# Allegro board DRAM_BOARD.brd
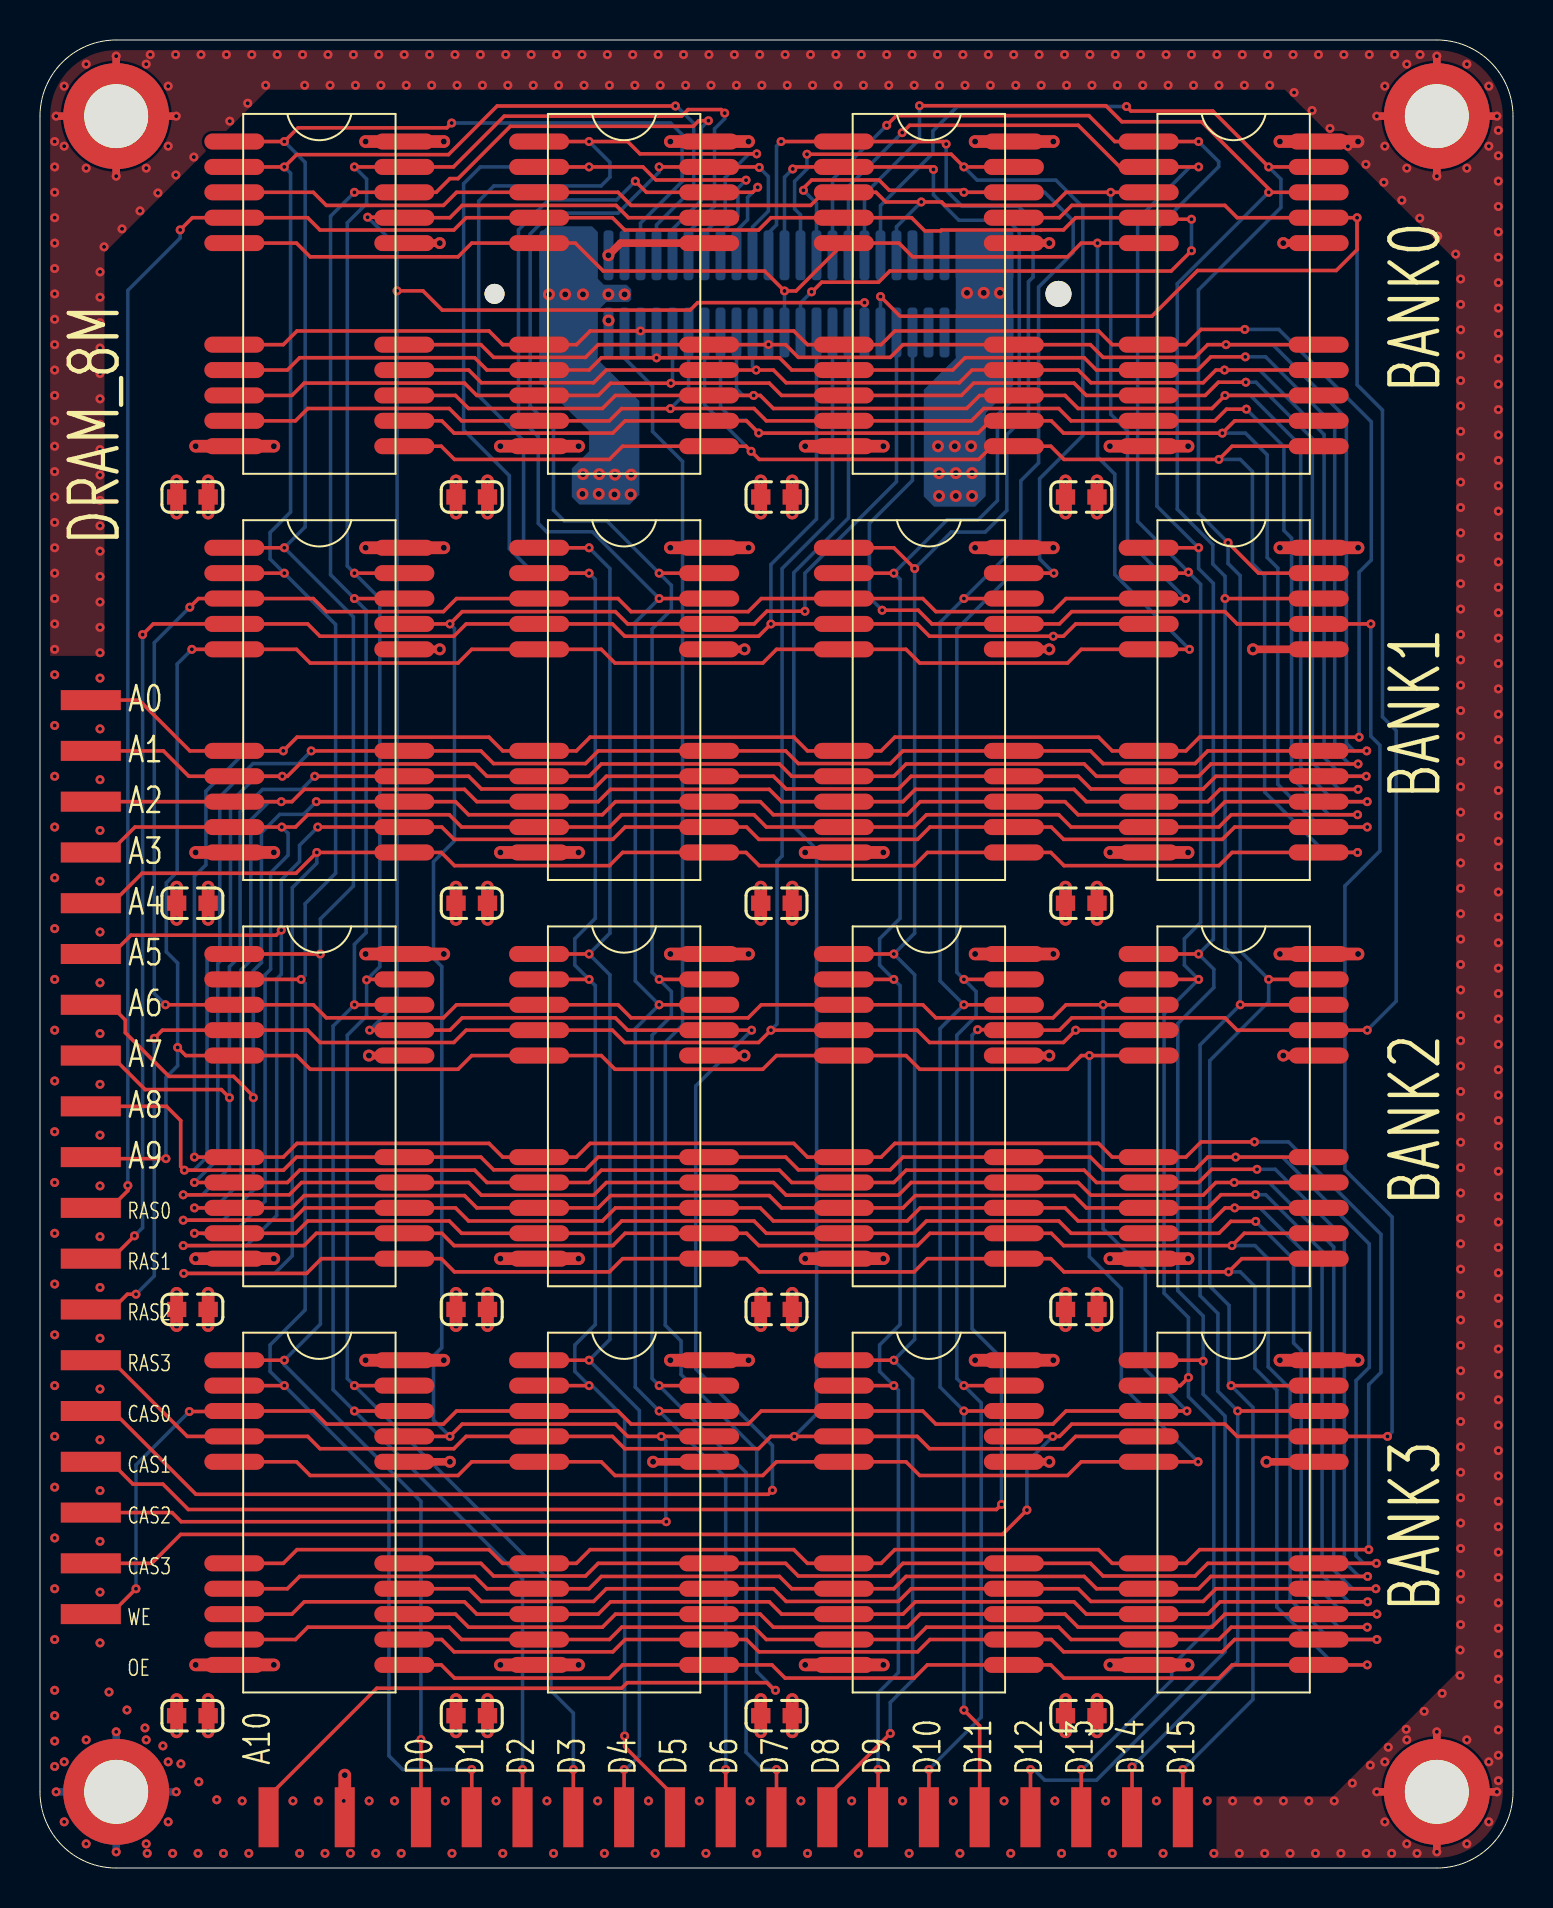
[diagram p0: board, top side]
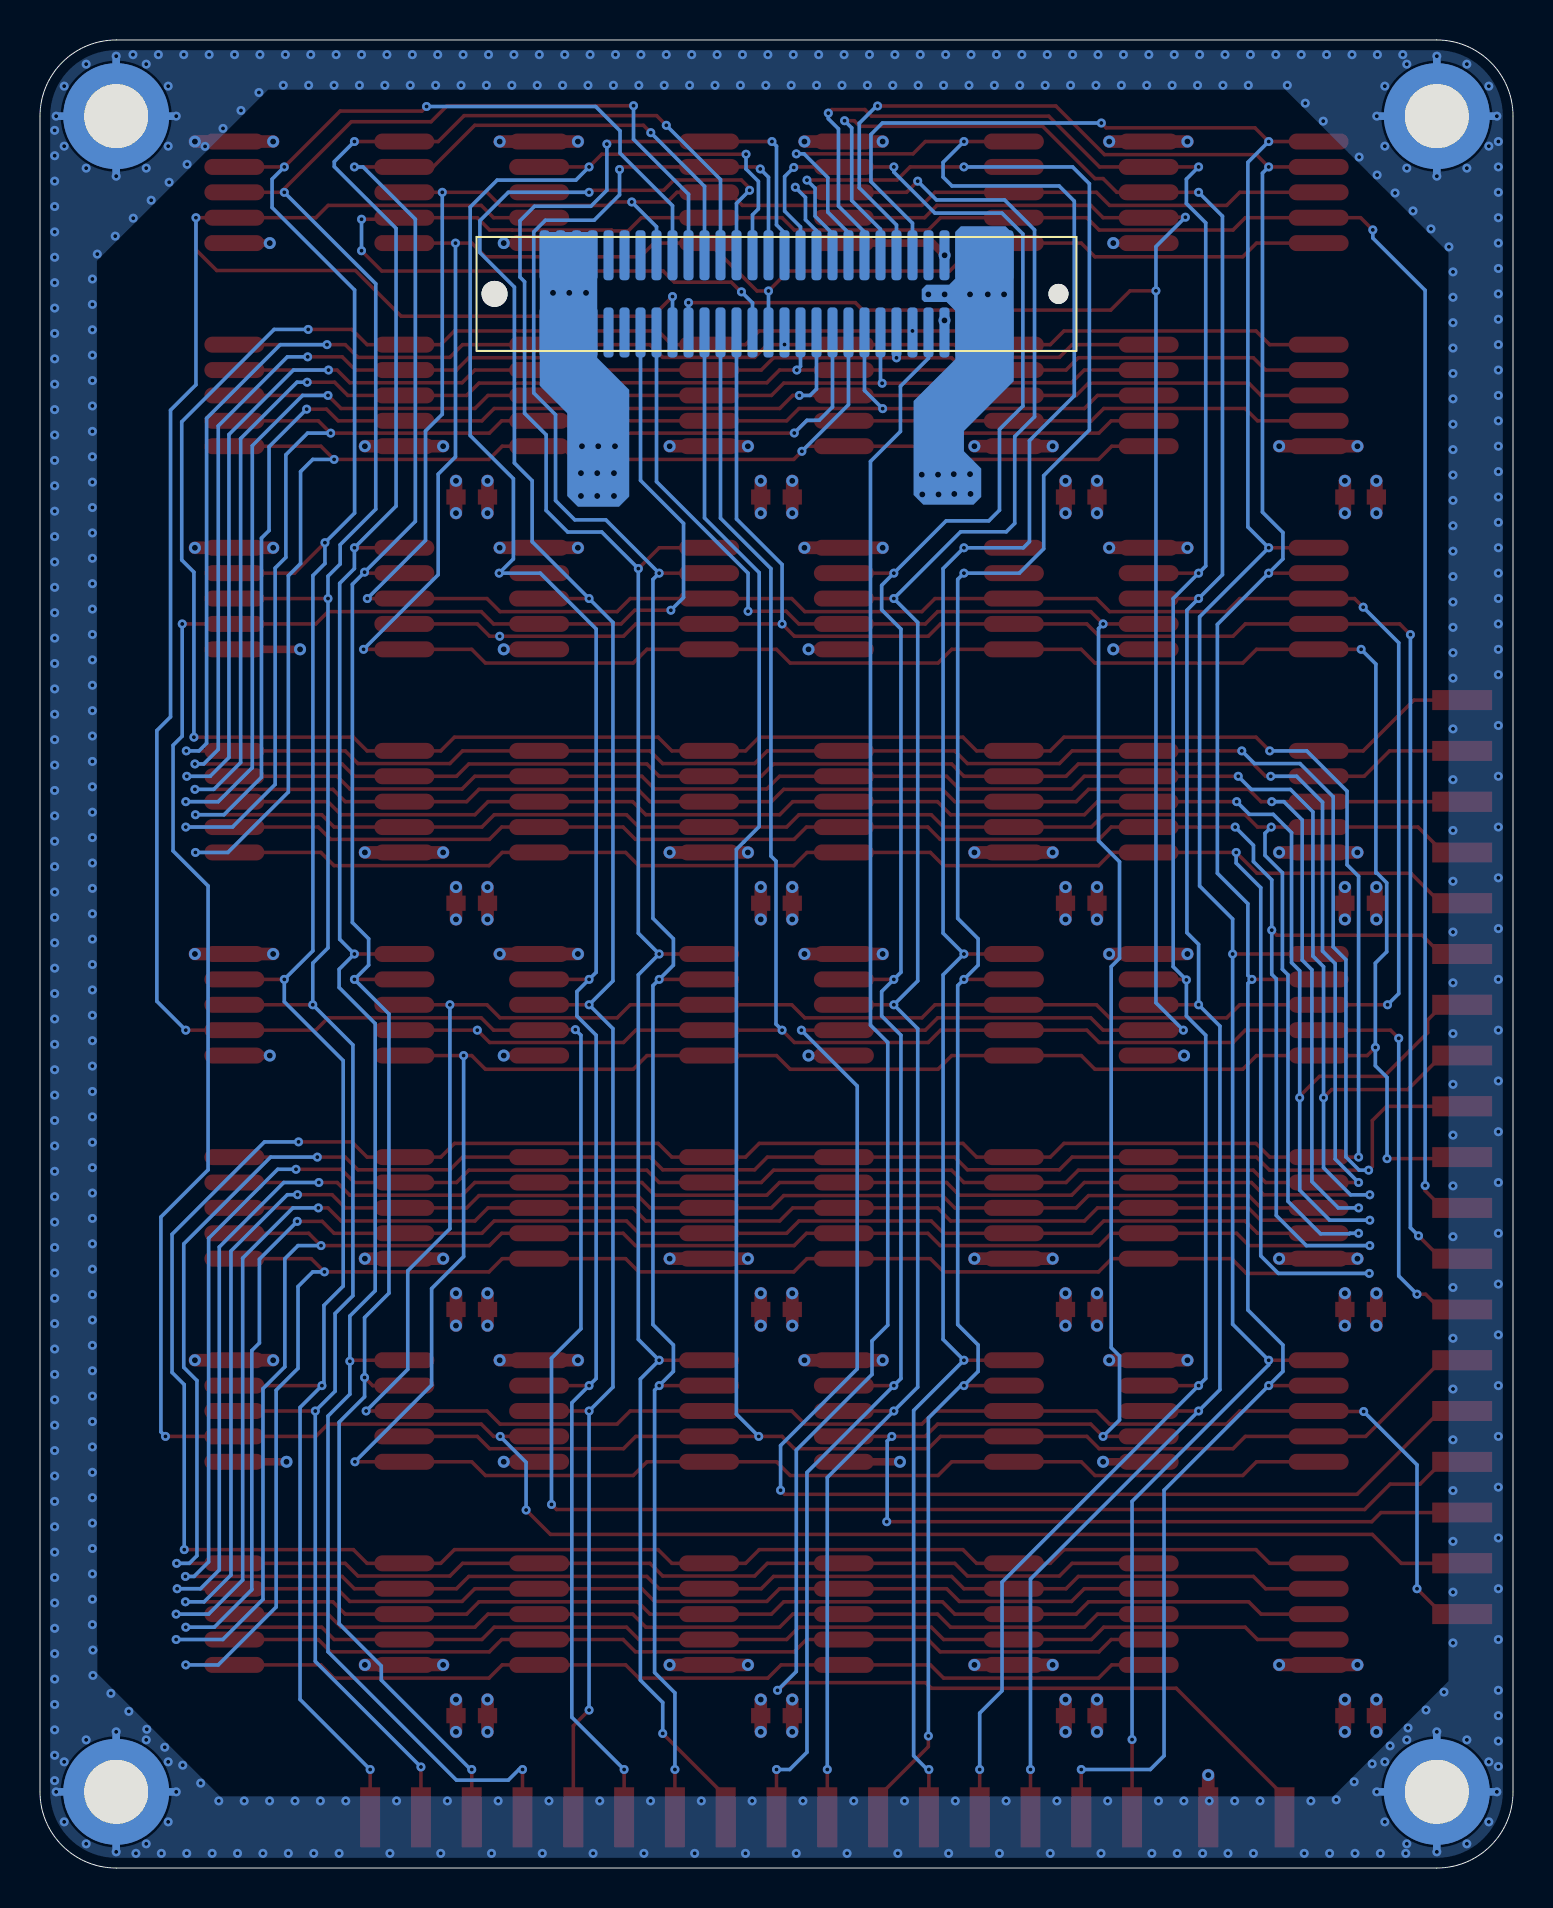
[diagram p1: board, bottom side, seen from below]

Outline 73.66 x 91.44 mm; copper layers: TOP, GND, POWER, BOTTOM. Coordinates in mm from the lower left corner of the outline.
Outline path: 0,87.63 arc(1.12,90.32) 3.81,91.44 69.85,91.44 arc(72.54,90.32) 73.66,87.63 73.66,3.81 arc(72.54,1.12) 69.85,0 3.81,0 arc(1.12,1.12) 0,3.81 0,87.63

## Design rules (mm)
constraint set DEFAULT: min track width 0.178, pair gap 0.178

## Placement (name value [footprint] x y rotation side)
C1  1uf  [C0603]  7.62 68.58 180 top
C2  1uf  [C0603]  21.59 68.58 180 top
C3  1uf  [C0603]  36.83 68.58 180 top
C4  1uf  [C0603]  52.07 68.58 180 top
C5  1uf  [C0603]  7.62 48.26 180 top
C6  1uf  [C0603]  21.59 48.26 180 top
C7  1uf  [C0603]  36.83 48.26 180 top
C8  1uf  [C0603]  52.07 48.26 180 top
C9  1uf  [C0603]  7.62 27.94 180 top
C10  1uf  [C0603]  21.59 27.94 180 top
C11  1uf  [C0603]  36.83 27.94 180 top
C12  1uf  [C0603]  52.07 27.94 180 top
C13  1uf  [C0603]  7.62 7.62 180 top
C14  1uf  [C0603]  21.59 7.62 180 top
C15  1uf  [C0603]  36.83 7.62 180 top
C16  1uf  [C0603]  52.07 7.62 180 top
J1  HEADER 30X2  [BTB-60P-0P8MM-MALE]  36.83 78.74 270 bottom
TP1  TEST_POINT  [TP-R-3X1MM]  19.05 2.54 90 top
TP2  TEST_POINT  [TP-R-3X1MM]  11.43 2.54 90 top
TP3  TEST_POINT  [TP-R-3X1MM]  2.54 58.42 0 top
TP4  TEST_POINT  [TP-R-3X1MM]  21.59 2.54 90 top
TP5  TEST_POINT  [TP-R-3X1MM]  2.54 55.88 0 top
TP6  M3  [M3-PAD]  3.81 87.63 0 top
TP7  TEST_POINT  [TP-R-3X1MM]  24.13 2.54 90 top
TP8  TEST_POINT  [TP-R-3X1MM]  2.54 53.34 0 top
TP9  TEST_POINT  [TP-R-3X1MM]  26.67 2.54 90 top
TP10  TEST_POINT  [TP-R-3X1MM]  2.54 50.8 0 top
TP11  M3  [M3-PAD]  69.85 87.63 0 top
TP12  TEST_POINT  [TP-R-3X1MM]  29.21 2.54 90 top
TP13  TEST_POINT  [TP-R-3X1MM]  2.54 48.26 0 top
TP14  TEST_POINT  [TP-R-3X1MM]  31.75 2.54 90 top
TP15  TEST_POINT  [TP-R-3X1MM]  2.54 45.72 0 top
TP16  M3  [M3-PAD]  3.81 3.81 0 top
TP17  TEST_POINT  [TP-R-3X1MM]  34.29 2.54 90 top
TP18  TEST_POINT  [TP-R-3X1MM]  2.54 43.18 0 top
TP19  TEST_POINT  [TP-R-3X1MM]  36.83 2.54 90 top
TP20  TEST_POINT  [TP-R-3X1MM]  2.54 40.64 0 top
TP21  M3  [M3-PAD]  69.85 3.81 0 top
TP22  TEST_POINT  [TP-R-3X1MM]  39.37 2.54 90 top
TP23  TEST_POINT  [TP-R-3X1MM]  2.54 38.1 0 top
TP24  TEST_POINT  [TP-R-3X1MM]  41.91 2.54 90 top
TP25  TEST_POINT  [TP-R-3X1MM]  2.54 35.56 0 top
TP26  TEST_POINT  [TP-R-3X1MM]  44.45 2.54 90 top
TP27  TEST_POINT  [TP-R-3X1MM]  2.54 33.02 0 top
TP28  TEST_POINT  [TP-R-3X1MM]  46.99 2.54 90 top
TP29  TEST_POINT  [TP-R-3X1MM]  2.54 30.48 0 top
TP30  TEST_POINT  [TP-R-3X1MM]  49.53 2.54 90 top
TP31  TEST_POINT  [TP-R-3X1MM]  2.54 27.94 0 top
TP32  TEST_POINT  [TP-R-3X1MM]  52.07 2.54 90 top
TP33  TEST_POINT  [TP-R-3X1MM]  2.54 25.4 0 top
TP34  TEST_POINT  [TP-R-3X1MM]  54.61 2.54 90 top
TP35  TEST_POINT  [TP-R-3X1MM]  2.54 22.86 0 top
TP36  TEST_POINT  [TP-R-3X1MM]  57.15 2.54 90 top
TP37  TEST_POINT  [TP-R-3X1MM]  2.54 20.32 0 top
TP38  TEST_POINT  [TP-R-3X1MM]  2.54 12.7 0 top
TP39  TEST_POINT  [TP-R-3X1MM]  2.54 17.78 0 top
TP41  TEST_POINT  [TP-R-3X1MM]  2.54 15.24 0 top
TP42  TEST_POINT  [TP-R-3X1MM]  15.24 2.54 90 top
U1  DRAM-1M-SOJ  [SOJ20-300MIL]  13.97 78.74 0 top
U2  DRAM-1M-SOJ  [SOJ20-300MIL]  29.21 78.74 0 top
U3  DRAM-1M-SOJ  [SOJ20-300MIL]  44.45 78.74 0 top
U4  DRAM-1M-SOJ  [SOJ20-300MIL]  59.69 78.74 0 top
U5  DRAM-1M-SOJ  [SOJ20-300MIL]  13.97 58.42 0 top
U6  DRAM-1M-SOJ  [SOJ20-300MIL]  29.21 58.42 0 top
U7  DRAM-1M-SOJ  [SOJ20-300MIL]  44.45 58.42 0 top
U8  DRAM-1M-SOJ  [SOJ20-300MIL]  59.69 58.42 0 top
U9  DRAM-1M-SOJ  [SOJ20-300MIL]  13.97 38.1 0 top
U10  DRAM-1M-SOJ  [SOJ20-300MIL]  29.21 38.1 0 top
U11  DRAM-1M-SOJ  [SOJ20-300MIL]  44.45 38.1 0 top
U12  DRAM-1M-SOJ  [SOJ20-300MIL]  59.69 38.1 0 top
U13  DRAM-1M-SOJ  [SOJ20-300MIL]  13.97 17.78 0 top
U14  DRAM-1M-SOJ  [SOJ20-300MIL]  29.21 17.78 0 top
U15  DRAM-1M-SOJ  [SOJ20-300MIL]  44.45 17.78 0 top
U16  DRAM-1M-SOJ  [SOJ20-300MIL]  59.69 17.78 0 top

## Library data of the parts
C1-C16 = CAP NP
J1 = HEADER 30X2
TP1-TP39 TP41 TP42 = TEST_POINT
U1-U16 = DRAM-1M-SOJ

## Footprints (pads in the part's own frame, mm; a bottom-side part is the same pattern mirrored in y, then rotated)
BTB-60P-0P8MM-MALE
  round 1.3 hole 1.3 unplated: (0,-14.1)
  round 1 hole 1 unplated: (0,14.1)
  rrect 2.5x0.5 smd: 1(1.93,11.6) 2(-1.93,11.6) 3(1.93,10.8) 4(-1.93,10.8) 5(1.93,10) 6(-1.93,10) 7(1.93,9.2) 8(-1.93,9.2) 9(1.93,8.4) 10(-1.93,8.4) 11(1.93,7.6) 12(-1.93,7.6) 13(1.93,6.8) 14(-1.93,6.8) 15(1.93,6) 16(-1.93,6) 17(1.93,5.2) 18(-1.93,5.2) 19(1.93,4.4) 20(-1.93,4.4) 21(1.93,3.6) 22(-1.93,3.6) 23(1.93,2.8) 24(-1.93,2.8) 25(1.93,2) 26(-1.93,2) 27(1.93,1.2) 28(-1.93,1.2) 29(1.93,0.4) 30(-1.93,0.4) 31(1.93,-0.4) 32(-1.93,-0.4) 33(1.93,-1.2) 34(-1.93,-1.2) 35(1.93,-2) 36(-1.93,-2) 37(1.93,-2.8) 38(-1.93,-2.8) 39(1.93,-3.6) 40(-1.93,-3.6) 41(1.93,-4.4) 42(-1.93,-4.4) 43(1.93,-5.2) 44(-1.93,-5.2) 45(1.93,-6) 46(-1.93,-6) 47(1.93,-6.8) 48(-1.93,-6.8) 49(1.93,-7.6) 50(-1.93,-7.6) 51(1.93,-8.4) 52(-1.93,-8.4) 53(1.93,-9.2) 54(-1.93,-9.2) 55(1.93,-10) 56(-1.93,-10) 57(1.93,-10.8) 58(-1.93,-10.8) 59(1.93,-11.6) 60(-1.93,-11.6)
C0603
  rect 0.965x0.762 smd: 1(-0.787,0) 2(0.787,0)
M3-PAD
  round 5.3 hole 3.2: 1(0,0)
SOJ20-300MIL
  oval 3x0.8 smd: 1(-4.25,7.62) 2(-4.25,6.35) 3(-4.25,5.08) 4(-4.25,3.81) 5(-4.25,2.54) 9(-4.25,-2.54) 10(-4.25,-3.81) 11(-4.25,-5.08) 12(-4.25,-6.35) 13(-4.25,-7.62) 14(4.25,-7.62) 15(4.25,-6.35) 16(4.25,-5.08) 17(4.25,-3.81) 18(4.25,-2.54) 22(4.25,2.54) 23(4.25,3.81) 24(4.25,5.08) 25(4.25,6.35) 26(4.25,7.62)
TP-R-3X1MM
  rect 3x1 smd: 1(0,0)

## Nets
GND: C1.2 C2.2 C3.2 C4.2 C5.2 C6.2 C7.2 C8.2 C9.2 C10.2 C11.2 C12.2 C13.2 C14.2 C15.2 C16.2 J1.9 J1.10 J1.53 J1.54 J1.55 J1.56 J1.57 J1.58 J1.59 J1.60 TP6.1 TP11.1 TP16.1 TP21.1 TP42.1 U1.22 U1.26 U2.22 U2.26 U3.22 U3.26 U4.22 U4.26 U5.22 U5.26 U6.22 U6.26 U7.22 U7.26 U8.22 U8.26 U9.22 U9.26 U10.22 U10.26 U11.22 U11.26 U12.22 U12.26 U13.22 U13.26 U14.22 U14.26 U15.22 U15.26 U16.22 U16.26
VCC_5V0: C1.1 C2.1 C3.1 C4.1 C5.1 C6.1 C7.1 C8.1 C9.1 C10.1 C11.1 C12.1 C13.1 C14.1 C15.1 C16.1 J1.1 J1.2 J1.3 J1.4 J1.5 J1.6 J1.7 J1.8 U1.13 U2.13 U3.13 U4.13 U5.13 U6.13 U7.13 U8.13 U9.13 U10.13 U11.13 U12.13 U13.13 U14.13 U15.13 U16.13
A0: J1.13 TP3.1 U1.9 U2.9 U3.9 U4.9 U5.9 U6.9 U7.9 U8.9 U9.9 U10.9 U11.9 U12.9 U13.9 U14.9 U15.9 U16.9
A1: J1.15 TP5.1 U1.10 U2.10 U3.10 U4.10 U5.10 U6.10 U7.10 U8.10 U9.10 U10.10 U11.10 U12.10 U13.10 U14.10 U15.10 U16.10
A2: J1.17 TP8.1 U1.11 U2.11 U3.11 U4.11 U5.11 U6.11 U7.11 U8.11 U9.11 U10.11 U11.11 U12.11 U13.11 U14.11 U15.11 U16.11
A3: J1.19 TP10.1 U1.12 U2.12 U3.12 U4.12 U5.12 U6.12 U7.12 U8.12 U9.12 U10.12 U11.12 U12.12 U13.12 U14.12 U15.12 U16.12
A4: J1.21 TP13.1 U1.14 U2.14 U3.14 U4.14 U5.14 U6.14 U7.14 U8.14 U9.14 U10.14 U11.14 U12.14 U13.14 U14.14 U15.14 U16.14
A5: J1.23 TP15.1 U1.15 U2.15 U3.15 U4.15 U5.15 U6.15 U7.15 U8.15 U9.15 U10.15 U11.15 U12.15 U13.15 U14.15 U15.15 U16.15
A6: J1.25 TP18.1 U1.16 U2.16 U3.16 U4.16 U5.16 U6.16 U7.16 U8.16 U9.16 U10.16 U11.16 U12.16 U13.16 U14.16 U15.16 U16.16
A7: J1.27 TP20.1 U1.17 U2.17 U3.17 U4.17 U5.17 U6.17 U7.17 U8.17 U9.17 U10.17 U11.17 U12.17 U13.17 U14.17 U15.17 U16.17
A8: J1.29 TP23.1 U1.18 U2.18 U3.18 U4.18 U5.18 U6.18 U7.18 U8.18 U9.18 U10.18 U11.18 U12.18 U13.18 U14.18 U15.18 U16.18
A9: J1.31 TP25.1 U1.5 U2.5 U3.5 U4.5 U5.5 U6.5 U7.5 U8.5 U9.5 U10.5 U11.5 U12.5 U13.5 U14.5 U15.5 U16.5
A10: J1.11 TP2.1
CAS_B_0: J1.41 TP35.1 U1.23 U2.23 U9.23 U10.23
CAS_B_1: J1.43 TP37.1 U3.23 U4.23 U11.23 U12.23
CAS_B_2: J1.45 TP39.1 U5.23 U6.23 U13.23 U14.23
CAS_B_3: J1.47 TP41.1 U7.23 U8.23 U15.23 U16.23
DQ0: J1.14 TP1.1 U1.1 U5.1 U9.1 U13.1
DQ1: J1.16 TP4.1 U1.2 U5.2 U9.2 U13.2
DQ2: J1.18 TP7.1 U1.24 U5.24 U9.24 U13.24
DQ3: J1.20 TP9.1 U1.25 U5.25 U9.25 U13.25
DQ4: J1.22 TP12.1 U2.1 U6.1 U10.1 U14.1
DQ5: J1.24 TP14.1 U2.2 U6.2 U10.2 U14.2
DQ6: J1.26 TP17.1 U2.24 U6.24 U10.24 U14.24
DQ7: J1.28 TP19.1 U2.25 U6.25 U10.25 U14.25
DQ8: J1.30 TP22.1 U3.1 U7.1 U11.1 U15.1
DQ9: J1.32 TP24.1 U3.2 U7.2 U11.2 U15.2
DQ10: J1.34 TP26.1 U3.25 U7.25 U11.25 U15.25
DQ11: J1.36 TP28.1 U3.24 U7.24 U11.24 U15.24
DQ12: J1.38 TP30.1 U4.1 U8.1 U12.1 U16.1
DQ13: J1.40 TP32.1 U4.2 U8.2 U12.2 U16.2
DQ14: J1.42 TP34.1 U4.24 U8.24 U12.24 U16.24
DQ15: J1.44 TP36.1 U4.25 U8.25 U12.25 U16.25
RAS_B_0: J1.33 TP27.1 U1.4 U2.4 U3.4 U4.4
RAS_B_1: J1.35 TP29.1 U5.4 U6.4 U7.4 U8.4
RAS_B_2: J1.37 TP31.1 U9.4 U10.4 U11.4 U12.4
RAS_B_3: J1.39 TP33.1 U13.4 U14.4 U15.4 U16.4
WE_B: J1.46 TP38.1 U1.3(WE#) U2.3(WE#) U3.3(WE#) U4.3(WE#) U5.3(WE#) U6.3(WE#) U7.3(WE#) U8.3(WE#) U9.3(WE#) U10.3(WE#) U11.3(WE#) U12.3(WE#) U13.3(WE#) U14.3(WE#) U15.3(WE#) U16.3(WE#)

Pads without a net: J1 12 48 49 50 51 52

## Via types
v1: diameter 0.45, hole 0.2, TOP to BOTTOM, 649 vias
v2: diameter 0.6, hole 0.3, TOP to BOTTOM, 171 vias

## Routing (per net, layer and track width the routed paths; a pad name or vN(x,y) marks a point on that pad's centre or on a via; arc(x,y) is an arc through that point)
GND: length 251.3
  TOP w0.381: U6.22 v2(35.23,60.96) ; TP6.1 6.64,87.63 ; TP6.1 3.81,84.8 ; TP6.1 0.98,87.63 ; TP6.1 3.81,90.46 ; 69.85,0.98 TP21.1 ; TP21.1 69.85,6.64 ; TP21.1 72.68,3.81 ; TP21.1 67.02,3.81 ; 69.85,84.8 TP11.1 ; TP11.1 69.85,90.46 ; TP11.1 67.02,87.63 ; TP11.1 72.68,87.63 ; U5.22 v2(19.99,60.96) ; U9.22 v2(16.45,40.64) ; U2.22 29.03,81.28 v2(28.42,80.67) ; U10.22 v2(35.23,40.64) ; U14.22 v2(30.66,20.32) ; U16.22 v2(61.33,20.32) ; U12.22 v2(62.17,40.64) ; U1.22 v2(19.99,81.28) ; U15.22 v2(50.47,20.32) ; U3.22 v2(50.47,81.28) ; U13.22 v2(20.5,20.32) ; U4.22 v2(62.17,81.28) ; U7.22 v2(50.47,60.96) ; U11.22 v2(50.47,40.64) ; U8.22 v2(60.66,60.96)
  TOP w0.635: v2(6.83,28.75) C9.2 v2(6.83,27.13) ; v2(6.83,47.45) C5.2 v2(6.83,49.07) ; v2(50.67,25.4) U15.26 v2(46.76,25.4) ; v2(46.76,66.04) U7.26 v2(50.67,66.04) ; v2(20.8,8.43) C14.2 v2(20.8,6.81) ; v2(36.04,27.13) C11.2 v2(36.04,28.75) ; v2(20.19,25.4) U13.26 v2(16.28,25.4) ; v2(46.76,86.36) U3.26 v2(50.67,86.36) ; v2(65.91,86.36) U4.26 v2(62,86.36) ; v2(20.19,86.36) U1.26 v2(16.28,86.36) ; v2(36.04,6.81) C15.2 v2(36.04,8.43) ; v2(51.28,27.13) C12.2 v2(51.28,28.75) ; v2(35.43,66.04) U6.26 v2(31.52,66.04) ; v2(65.91,25.4) U16.26 v2(62,25.4) ; v2(6.83,69.39) C1.2 v2(6.83,67.77) ; v2(36.04,67.77) C3.2 v2(36.04,69.39) ; v2(36.04,47.45) C7.2 v2(36.04,49.07) ; v2(46.76,45.72) U11.26 v2(50.67,45.72) ; TP42.1 v2(15.24,4.65) ; v2(31.52,86.36) U2.26 v2(35.43,86.36) ; v2(35.43,45.72) U10.26 v2(31.52,45.72) ; v2(20.19,66.04) U5.26 v2(16.28,66.04) ; v2(20.8,49.07) C6.2 v2(20.8,47.45) ; v2(6.83,6.81) C13.2 v2(6.83,8.43) ; v2(51.28,6.81) C16.2 v2(51.28,8.43) ; v2(20.19,45.72) U9.26 v2(16.28,45.72) ; v2(62,66.04) U8.26 v2(65.91,66.04) ; v2(35.43,25.4) U14.26 v2(31.52,25.4) ; v2(62,45.72) U12.26 v2(65.91,45.72) ; v2(51.28,69.39) C4.2 v2(51.28,67.77) ; v2(20.8,69.39) C2.2 v2(20.8,67.77) ; v2(20.8,28.75) C10.2 v2(20.8,27.13) ; v2(51.28,49.07) C8.2 v2(51.28,47.45)
  GND w0.381: 0.98,3.81 TP16.1 ; TP16.1 3.81,6.64 ; TP16.1 3.81,0.98 ; TP16.1 6.64,3.81 ; 3.81,84.8 TP6.1 ; TP6.1 3.81,90.46 ; TP6.1 6.64,87.63 ; TP6.1 0.98,87.63 ; 67.02,87.63 TP11.1 ; TP11.1 72.68,87.63 ; TP11.1 69.85,84.8 ; TP11.1 69.85,90.46 ; TP21.1 72.68,3.81 ; TP21.1 69.85,6.64 ; TP21.1 69.85,0.98 ; TP21.1 67.02,3.81
  BOTTOM w0.381: J1.10 v2(28.42,80.67) ; 0.98,3.81 TP16.1 ; TP16.1 3.81,6.64 ; TP16.1 6.64,3.81 ; TP16.1 3.81,0.98 ; J1.9 v2(28.43,77.41) ; TP11.1 72.68,87.63 ; TP11.1 69.85,84.8 ; TP11.1 69.85,90.46 ; TP11.1 67.02,87.63 ; TP6.1 6.64,87.63 ; TP6.1 0.98,87.63 ; TP6.1 3.81,84.8 ; TP6.1 3.81,90.46 ; TP21.1 72.68,3.81 ; TP21.1 67.02,3.81 ; TP21.1 69.85,0.98 ; TP21.1 69.85,6.64
  vias: v1(0.81,87.63) v1(0.73,86.36) v1(0.73,85.09) v1(0.73,83.82) v1(0.73,82.55) v1(0.73,81.28) v1(0.73,80.01) v1(0.73,78.74) v1(0.73,77.47) v1(0.73,76.2) v1(0.73,74.93) v1(0.73,73.66) v1(0.73,72.39) v1(0.73,71.12) v1(0.73,69.85) v1(0.73,68.58) v1(0.73,67.31) v1(0.73,66.04) v1(0.73,64.77) v1(0.73,63.5) v1(0.73,62.23) v1(0.73,60.96) v1(0.73,59.69) v1(0.73,57.15) v1(0.73,54.61) v1(0.73,52.07) v1(0.73,49.53) v1(0.73,46.99) v1(0.73,44.45) v1(0.73,41.91) v1(0.73,39.37) v1(0.73,36.83) v1(0.73,34.29) v1(0.73,31.75) v1(0.73,29.21) v1(0.73,26.67) v1(0.73,24.13) v1(0.73,21.59) v1(0.73,19.05) v1(0.73,16.51) v1(0.73,13.97) v1(0.73,11.43) v1(0.73,8.89) v1(0.73,7.62) v1(0.73,6.35) v1(0.73,5.08) v1(0.81,3.81) v1(1.21,89.13) v1(1.21,86.13) v1(1.21,5.31) v1(1.21,2.31) v1(2.31,90.23) v1(2.31,85.03) v1(2.31,6.41) v1(2.31,1.21) v1(3,79.84) v1(3,78.57) v1(3,77.3) v1(3,76.03) v1(3,74.76) v1(3,73.49) v1(3,72.22) v1(3,70.95) v1(3,69.68) v1(3,68.41) v1(3,67.14) v1(3,65.87) v1(3,64.6) v1(3,63.33) v1(3,62.06) v1(3,60.79) v1(3,59.52) v1(3,56.98) v1(3,54.44) v1(3,51.9) v1(3,49.36) v1(3,46.82) v1(3,44.28) v1(3,41.74) v1(3,39.2) v1(3,36.66) v1(3,34.12) v1(3,31.58) v1(3,29.04) v1(3,26.5) v1(3,23.96) v1(3,21.42) v1(3,18.88) v1(3,16.34) v1(3,13.8) v1(3,11.26) v1(3.2,81.09) v1(3.45,8.8) v1(3.81,90.63) v1(3.81,84.63) v1(3.81,6.81) v1(3.81,0.81) v1(4.1,81.99) v1(4.35,7.9) v1(5,82.89) v1(5.31,90.23) v1(5.31,85.03) v1(5.25,7.01) v1(5.31,6.41) v1(5.31,1.21) v1(5.36,0.73) v1(5.51,90.71) v1(5.9,83.79) v1(6.15,6.11) v1(6.41,89.13) v1(6.41,86.13) v1(6.41,5.31) v1(6.41,2.31) v1(6.63,0.73) v1(6.78,90.71) v1(6.81,87.63) v1(6.8,84.69) v1(6.81,3.81) v1(7.04,5.21) v1(7.69,85.58) v1(7.9,0.73) v1(7.94,4.31) v1(8.05,90.71) v1(8.84,3.41) v1(9.17,0.73) v1(9.32,90.71) v1(9.49,87.38) v1(10.11,3.36) v1(10.39,88.28) v1(10.44,0.73) v1(10.59,90.71) v1(11.29,89.18) v1(11.86,90.71) v1(12.65,3.36) v1(12.98,0.73) v1(13.13,90.71) v1(13.24,89.18) v1(13.92,3.36) v1(14.25,0.73) v1(14.4,90.71) v1(14.51,89.18) v1(15.19,3.36) v1(15.52,0.73) v1(15.67,90.71) v1(15.78,89.18) v1(16.46,3.36) v1(16.79,0.73) v1(16.94,90.71) v1(17.05,89.18) v1(17.73,3.36) v1(18.06,0.73) v1(18.21,90.71) v1(18.32,89.18) v1(19.48,90.71) v1(19.59,89.18) v1(20.27,3.36) v1(20.6,0.73) v1(20.75,90.71) v1(20.86,89.18) v1(22.02,90.71) v1(22.13,89.18) v1(22.81,3.36) v1(23.14,0.73) v1(23.29,90.71) v1(23.4,89.18) v1(24.56,90.71) v1(24.67,89.18) v1(25.35,3.36) v1(25.68,0.73) v1(25.83,90.71) v1(25.94,89.18) v1(27.1,90.71) v1(27.21,89.18) v1(27.89,3.36) v1(28.22,0.73) v1(28.37,90.71) v1(28.48,89.18) v1(29.64,90.71) v1(29.75,89.18) v1(30.43,3.36) v1(30.76,0.73) v1(30.91,90.71) v1(31.02,89.18) v1(32.18,90.71) v1(32.29,89.18) v1(32.97,3.36) v1(33.3,0.73) v1(33.45,90.71) v1(33.56,89.18) v1(34.72,90.71) v1(34.83,89.18) v1(35.51,3.36) v1(35.84,0.73) v1(35.99,90.71) v1(36.1,89.18) v1(37.26,90.71) v1(37.37,89.18) v1(38.05,3.36) v1(38.38,0.73) v1(38.53,90.71) v1(38.64,89.18) v1(39.8,90.71) v1(39.91,89.18) v1(40.59,3.36) v1(40.92,0.73) v1(41.07,90.71) v1(41.18,89.18) v1(42.34,90.71) v1(42.45,89.18) v1(43.13,3.36) v1(43.46,0.73) v1(43.61,90.71) v1(43.72,89.18) v1(44.88,90.71) v1(44.99,89.18) v1(45.67,3.36) v1(46,0.73) v1(46.15,90.71) v1(46.26,89.18) v1(47.42,90.71) v1(47.53,89.18) v1(48.21,3.36) v1(48.54,0.73) v1(48.69,90.71) v1(48.8,89.18) v1(49.96,90.71) v1(50.07,89.18) v1(50.75,3.36) v1(51.08,0.73) v1(51.23,90.71) v1(51.34,89.18) v1(52.5,90.71) v1(52.61,89.18) v1(53.29,3.36) v1(53.62,0.73) v1(53.77,90.71) v1(53.88,89.18) v1(55.04,90.71) v1(55.15,89.18) v1(55.83,3.36) v1(56.16,0.73) v1(56.31,90.71) v1(56.42,89.18) v1(57.58,90.71) v1(57.69,89.18) v1(58.37,3.36) v1(58.7,0.73) v1(58.85,90.71) v1(58.96,89.18) v1(59.64,3.36) v1(59.97,0.73) v1(60.12,90.71) v1(60.23,89.18) v1(60.91,3.36) v1(61.24,0.73) v1(61.39,90.71) v1(61.5,89.18) v1(62.18,3.36) v1(62.51,0.73) v1(62.66,90.71) v1(62.71,88.81) v1(63.45,3.36) v1(63.61,87.91) v1(63.78,0.73) v1(63.93,90.71) v1(64.51,87.02) v1(64.72,3.36) v1(65.05,0.73) v1(65.2,90.71) v1(65.41,86.12) v1(65.63,4.25) v1(66.3,85.22) v1(66.32,0.73) v1(66.47,90.71) v1(66.52,5.14) v1(66.85,87.63) v1(66.85,3.81) v1(67.2,84.32) v1(67.25,89.13) v1(67.25,86.13) v1(67.25,5.31) v1(67.25,2.31) v1(67.42,6.04) v1(67.59,0.73) v1(67.74,90.71) v1(68.1,83.42) v1(68.32,6.94) v1(68.35,90.23) v1(68.35,85.03) v1(68.35,6.41) v1(68.35,1.21) v1(68.86,0.73) v1(69.01,90.71) v1(69,82.53) v1(69.22,7.84) v1(69.85,90.63) v1(69.85,84.63) v1(69.9,81.63) v1(69.85,6.81) v1(69.85,0.81) v1(70.12,8.74) v1(70.79,80.73) v1(71.01,10.9) v1(71.01,9.63) v1(71.04,79.48) v1(71.04,78.21) v1(71.04,76.94) v1(71.04,75.67) v1(71.04,74.4) v1(71.04,73.13) v1(71.04,71.86) v1(71.04,70.59) v1(71.04,69.32) v1(71.04,68.05) v1(71.04,66.78) v1(71.04,65.51) v1(71.04,64.24) v1(71.04,62.97) v1(71.04,61.7) v1(71.04,60.43) v1(71.04,59.16) v1(71.04,57.89) v1(71.04,56.62) v1(71.04,55.35) v1(71.04,54.08) v1(71.04,52.81) v1(71.04,51.54) v1(71.04,50.27) v1(71.04,49) v1(71.04,47.73) v1(71.04,46.46) v1(71.04,45.19) v1(71.04,43.92) v1(71.04,42.65) v1(71.04,41.38) v1(71.04,40.11) v1(71.04,38.84) v1(71.04,37.57) v1(71.04,36.3) v1(71.04,35.03) v1(71.04,33.76) v1(71.04,32.49) v1(71.04,31.22) v1(71.04,29.95) v1(71.04,28.68) v1(71.04,27.41) v1(71.04,26.14) v1(71.04,24.87) v1(71.04,23.6) v1(71.04,22.33) v1(71.04,21.06) v1(71.04,19.79) v1(71.04,18.52) v1(71.04,17.25) v1(71.04,15.98) v1(71.04,14.71) v1(71.04,13.44) v1(71.04,12.17) v1(71.35,90.23) v1(71.35,85.03) v1(71.35,6.41) v1(71.35,1.21) v1(72.45,89.13) v1(72.45,86.13) v1(72.45,5.31) v1(72.45,2.31) v1(72.85,87.63) v1(72.85,3.81) v1(72.93,86.92) v1(72.93,85.65) v1(72.93,84.38) v1(72.93,83.11) v1(72.93,81.84) v1(72.93,80.57) v1(72.93,79.3) v1(72.93,78.03) v1(72.93,76.76) v1(72.93,75.49) v1(72.93,74.22) v1(72.93,72.95) v1(72.93,71.68) v1(72.93,70.41) v1(72.93,69.14) v1(72.93,67.87) v1(72.93,66.6) v1(72.93,65.33) v1(72.93,64.06) v1(72.93,62.79) v1(72.93,61.52) v1(72.93,60.25) v1(72.93,58.98) v1(72.93,57.71) v1(72.93,56.44) v1(72.93,55.17) v1(72.93,53.9) v1(72.93,52.63) v1(72.93,51.36) v1(72.93,50.09) v1(72.93,48.82) v1(72.93,47.55) v1(72.93,46.28) v1(72.93,45.01) v1(72.93,43.74) v1(72.93,42.47) v1(72.93,41.2) v1(72.93,39.93) v1(72.93,38.66) v1(72.93,37.39) v1(72.93,36.12) v1(72.93,34.85) v1(72.93,33.58) v1(72.93,32.31) v1(72.93,31.04) v1(72.93,29.77) v1(72.93,28.5) v1(72.93,27.23) v1(72.93,25.96) v1(72.93,24.69) v1(72.93,23.42) v1(72.93,22.15) v1(72.93,20.88) v1(72.93,19.61) v1(72.93,18.34) v1(72.93,17.07) v1(72.93,15.8) v1(72.93,14.53) v1(72.93,13.26) v1(72.93,11.99) v1(72.93,10.72) v1(72.93,9.45) v1(72.93,8.18) v1(72.93,6.91) v1(72.93,5.64) v1(72.93,4.37) v2(44.91,71.12) v2(44.96,69.77) v2(44.96,68.63) v2(45.75,71.12) v2(45.8,69.77) v2(45.8,68.63) v2(46.35,78.79) v2(46.56,71.12) v2(46.61,69.77) v2(46.61,68.63) v2(47.19,78.79) v2(48.01,78.79)
VCC_5V0: length 88.4
  TOP w0.635: v2(7.78,50.8) U5.13 v2(11.69,50.8) ; v2(57.41,30.48) U12.13 v2(53.5,30.48) ; v2(52.86,27.13) C12.1 v2(52.86,28.75) ; v2(22.38,67.77) C2.1 v2(22.38,69.39) ; v2(26.93,30.48) U10.13 v2(23.02,30.48) ; v2(52.86,69.39) C4.1 v2(52.86,67.77) ; v2(11.69,71.12) U1.13 v2(7.78,71.12) ; v2(38.26,71.12) U3.13 v2(42.17,71.12) ; v2(42.17,50.8) U7.13 v2(38.26,50.8) ; v2(7.78,10.16) U13.13 v2(11.69,10.16) ; v2(23.02,10.16) U14.13 v2(26.93,10.16) ; v2(8.41,6.81) C13.1 v2(8.41,8.43) ; v2(53.5,50.8) U8.13 v2(57.41,50.8) ; v2(52.86,47.45) C8.1 v2(52.86,49.07) ; v2(23.02,50.8) U6.13 v2(26.93,50.8) ; v2(37.62,6.81) C15.1 v2(37.62,8.43) ; v2(8.41,47.45) C5.1 v2(8.41,49.07) ; v2(23.02,71.12) U2.13 v2(26.93,71.12) ; v2(57.41,10.16) U16.13 v2(53.5,10.16) ; v2(37.62,27.13) C11.1 v2(37.62,28.75) ; v2(22.38,8.43) C14.1 v2(22.38,6.81) ; v2(8.41,28.75) C9.1 v2(8.41,27.13) ; v2(37.62,49.07) C7.1 v2(37.62,47.45) ; v2(22.38,47.45) C6.1 v2(22.38,49.07) ; v2(37.62,67.77) C3.1 v2(37.62,69.39) ; v2(8.41,67.77) C1.1 v2(8.41,69.39) ; v2(38.26,30.48) U11.13 v2(42.17,30.48) ; v2(57.41,71.12) U4.13 v2(53.5,71.12) ; v2(42.17,10.16) U15.13 v2(38.26,10.16) ; v2(11.69,30.48) U9.13 v2(7.78,30.48) ; v2(52.86,8.43) C16.1 v2(52.86,6.81) ; v2(22.38,27.13) C10.1 v2(22.38,28.75)
  vias: v2(25.45,78.71) v2(26.26,78.71) v2(27.15,78.71) v2(27.15,69.72) v2(27.13,68.73) v2(27.97,69.72) v2(27.94,68.73) v2(28.42,78.71) v2(28.75,69.7) v2(28.73,68.71) v2(29.24,78.71) v2(29.57,69.7) v2(29.54,68.71)
A0: length 304.6
  TOP w0.178: TP3.1 4.95,58.42 7.49,55.88 U5.9 v1(12.17,55.88) 12.85,56.57 22.45,56.57 23.14,55.88 U6.9 26.82,55.88 27.51,56.57 37.69,56.57 38.38,55.88 U7.9 42.06,55.88 42.75,56.57 52.93,56.57 53.62,55.88 U8.9 57.3,55.88 57.99,56.57 v1(65.96,56.57) ; v1(60.73,36.32) 58.06,36.32 57.3,35.56 U12.9 53.62,35.56 52.93,36.25 42.75,36.25 42.06,35.56 U11.9 38.38,35.56 37.69,36.25 27.51,36.25 26.82,35.56 U10.9 23.14,35.56 22.45,36.25 12.85,36.25 12.17,35.56 U9.9 v1(7.72,35.56) ; U13.9 12.17,15.24 12.85,15.93 22.45,15.93 23.14,15.24 U14.9 26.82,15.24 27.51,15.93 37.69,15.93 38.38,15.24 U15.9 42.06,15.24 42.75,15.93 52.93,15.93 53.62,15.24 U16.9 57.3,15.24 57.99,15.93 v1(66.45,15.93) ; U1.9 12.17,76.2 12.85,76.89 22.45,76.89 23.14,76.2 U2.9 26.82,76.2 27.51,76.89 v1(30.03,76.89) 37.69,76.89 38.38,76.2 U3.9 42.06,76.2 42.75,76.89 52.93,76.89 53.62,76.2 U4.9 57.3,76.2 58.06,76.96 v1(60.25,76.96)
  BOTTOM w0.178: J1.13 v1(30.03,76.89) ; v1(66.45,15.93) 66.45,24.18 67.06,24.79 67.06,31.7 62.43,36.32 v1(60.73,36.32) ; v1(7.72,35.56) 7.72,49.61 8.3,50.18 8.3,53.87 10.31,55.88 v1(12.17,55.88) ; v1(65.96,56.57) 65.96,64.82 66.57,65.43 66.57,72.34 61.95,76.96 v1(60.25,76.96)
A1: length 302.6
  TOP w0.178: v1(60.86,34.95) 58.6,34.95 57.94,34.29 U12.10 52.83,34.29 52.22,34.91 43.31,34.91 42.7,34.29 U11.10 37.59,34.29 36.98,34.91 28.07,34.91 27.46,34.29 U10.10 22.35,34.29 21.74,34.91 12.99,34.91 12.37,34.29 U9.10 v1(7.72,34.29) ; v1(66.39,14.59) 58.55,14.59 57.94,13.97 U16.10 52.83,13.97 52.22,14.59 43.31,14.59 42.7,13.97 U15.10 37.59,13.97 36.98,14.59 28.07,14.59 27.46,13.97 U14.10 22.35,13.97 21.74,14.59 12.99,14.59 12.37,13.97 U13.10 ; U1.10 12.37,74.93 12.99,75.55 21.74,75.55 22.35,74.93 U2.10 27.46,74.93 28.07,75.55 30.82,75.55 v1(30.83,75.54) 30.84,75.55 36.98,75.55 37.59,74.93 U3.10 45.64,74.93 46.26,75.55 52.22,75.55 52.83,74.93 U4.10 57.89,74.93 58.55,75.59 v1(60.27,75.59) ; TP5.1 6.17,55.88 7.44,54.61 U5.10 v1(12.12,54.61) 12.37,54.61 12.99,55.23 21.74,55.23 22.35,54.61 U6.10 27.46,54.61 28.07,55.23 36.98,55.23 37.59,54.61 U7.10 42.7,54.61 43.31,55.23 52.22,55.23 52.83,54.61 U8.10 57.94,54.61 58.55,55.23 v1(65.91,55.23)
  BOTTOM w0.178: v1(12.12,54.61) 10.82,54.61 9.52,53.31 9.52,45.87 8.89,45.24 8.89,35.46 v1(7.72,34.29) ; v1(60.86,34.95) 61.77,34.95 65.23,31.5 65.23,15.31 65.95,14.59 v1(66.39,14.59) 66.4,14.59 ; v1(65.91,55.23) 65.47,55.23 64.74,55.95 64.74,72.14 61.29,75.59 v1(60.27,75.59) ; J1.15 v1(30.83,75.54)
A2: length 303.6
  TOP w0.178: TP8.1 U5.11 v1(12.07,53.34) 12.6,53.34 13.21,53.96 21.23,53.96 21.84,53.34 U6.11 27.91,53.34 28.53,53.96 36.47,53.96 37.08,53.34 U7.11 43.15,53.34 43.77,53.96 51.71,53.96 52.32,53.34 U8.11 58.39,53.34 59.01,53.96 v1(65.91,53.96) ; U13.11 12.6,12.7 13.21,13.32 21.23,13.32 21.84,12.7 U14.11 27.91,12.7 28.53,13.32 36.47,13.32 37.08,12.7 U15.11 43.15,12.7 43.77,13.32 51.71,13.32 52.32,12.7 U16.11 58.39,12.7 59.01,13.32 v1(66.39,13.32) ; v1(60.3,74.32) 58.93,74.32 58.27,73.66 U4.11 52.32,73.66 51.71,74.28 46.69,74.28 46.08,73.66 U3.11 37.08,73.66 36.47,74.28 31.55,74.28 v1(31.55,74.27) 28.52,74.27 27.91,73.66 U2.11 21.84,73.66 21.23,74.28 13.21,74.28 12.6,73.66 U1.11 ; v1(7.72,33.02) U9.11 12.6,33.02 13.21,33.64 21.23,33.64 21.84,33.02 U10.11 27.91,33.02 28.53,33.64 36.47,33.64 37.08,33.02 U11.11 43.15,33.02 43.77,33.64 51.71,33.64 52.32,33.02 U12.11 58.39,33.02 59.05,33.68 v1(60.78,33.68)
  BOTTOM w0.178: v1(60.78,33.68) 61.29,33.68 64.11,30.86 64.11,14.66 65.45,13.32 v1(66.39,13.32) 66.4,13.32 ; v1(60.3,74.32) 60.81,74.32 63.63,71.5 63.63,55.3 64.97,53.96 v1(65.91,53.96) ; v1(7.72,33.02) 8.74,33.02 10.06,34.34 10.06,44.93 10.54,45.42 10.54,52.43 11.46,53.34 v1(12.07,53.34) ; v1(31.55,74.27) 31.63,74.35 J1.17
A3: length 305.9
  TOP w0.178: U1.12 12.78,72.39 13.39,73.01 20.47,73.01 21.08,72.39 U2.12 28.47,72.39 29.08,73 v1(31.52,73) 31.53,73.01 35.71,73.01 36.32,72.39 U3.12 46.58,72.39 47.2,73.01 50.95,73.01 51.56,72.39 U4.12 58.75,72.39 59.33,72.97 v1(60.32,72.97) ; v1(7.72,31.75) U9.12 12.78,31.75 13.39,32.37 20.47,32.37 21.08,31.75 U10.12 28.47,31.75 29.09,32.37 35.71,32.37 36.32,31.75 U11.12 43.71,31.75 44.33,32.37 50.95,32.37 51.56,31.75 U12.12 58.95,31.75 59.55,32.35 v1(60.79,32.35) ; v1(65.89,52.69) 59.57,52.69 58.95,52.07 U8.12 51.56,52.07 50.95,52.69 44.33,52.69 43.71,52.07 U7.12 36.32,52.07 35.71,52.69 29.09,52.69 28.47,52.07 U6.12 21.08,52.07 20.47,52.69 13.39,52.69 12.78,52.07 v1(12.09,52.07) U5.12 4.75,52.07 3.48,50.8 TP10.1 ; v1(66.37,12.05) 59.57,12.05 58.95,11.43 U16.12 51.56,11.43 50.95,12.05 44.33,12.05 43.71,11.43 U15.12 36.32,11.43 35.71,12.05 29.09,12.05 28.47,11.43 U14.12 21.08,11.43 20.47,12.05 13.39,12.05 12.78,11.43 U13.12
  BOTTOM w0.178: v1(65.89,52.69) 64.46,52.69 62.59,54.56 62.59,66.52 62.2,66.9 62.2,71.09 v1(60.32,72.97) ; J1.19 32.43,73.91 v1(31.52,73) ; v1(66.37,12.05) 64.94,12.05 63.07,13.92 63.07,25.88 62.69,26.26 62.69,30.45 v1(60.79,32.35) ; v1(7.72,31.75) 8.16,31.75 8.19,31.72 9.63,31.72 11.25,33.35 11.25,44.68 11.53,44.96 11.53,49.78 12.4,50.65 12.4,51.76 v1(12.09,52.07)
A4: length 303.2
  TOP w0.178: U1.14 20.07,71.12 20.73,70.46 28.47,70.46 29.13,71.12 U2.14 35.31,71.12 v1(35.56,70.87) 35.97,70.46 46.94,70.46 47.6,71.12 U3.14 50.55,71.12 51.21,70.46 v1(58.95,70.46) 59.61,71.12 U4.14 ; TP13.1 3.61,48.26 5.11,49.76 12.8,49.76 v1(13.84,50.8) U5.14 20.07,50.8 20.73,50.14 28.47,50.14 29.13,50.8 U6.14 35.31,50.8 35.97,50.14 43.71,50.14 44.37,50.8 U7.14 50.55,50.8 51.21,50.14 58.95,50.14 59.61,50.8 U8.14 v1(65.89,50.8) ; v1(7.19,29.74) 13.34,29.74 14.07,30.48 U9.14 20.07,30.48 20.73,29.82 28.47,29.82 29.13,30.48 U10.14 35.31,30.48 35.97,29.82 43.71,29.82 44.37,30.48 U11.14 50.55,30.48 51.21,29.82 v1(59.44,29.82) 60.1,30.48 U12.14 ; U13.14 20.07,10.16 20.73,9.5 28.47,9.5 29.13,10.16 U14.14 36.6,10.16 37.26,9.5 43.71,9.5 44.37,10.16 U15.14 50.55,10.16 51.21,9.5 58.95,9.5 59.61,10.16 U16.14 v1(66.37,10.16)
  BOTTOM w0.178: v1(66.37,10.16) 64.74,10.16 61.85,13.06 61.85,23.9 60.76,24.99 60.76,29.08 60.02,29.82 v1(59.44,29.82) ; v1(35.56,70.87) 33.23,73.2 J1.21 ; v1(65.89,50.8) 64.26,50.8 61.24,53.82 61.24,64.64 60.63,65.25 60.63,69.85 60.02,70.46 v1(58.95,70.46) ; v1(7.19,29.74) 11.73,29.74 12.61,30.62 12.61,49.04 13.84,50.27 v1(13.84,50.8)
A5: length 301.3
  TOP w0.178: v1(12.07,46.91) 11.81,46.66 4.55,46.66 3.61,45.72 TP15.1 ; v1(66.85,11.43) U16.15 59.74,11.43 59.12,10.81 51.19,10.81 50.57,11.43 U15.15 44.5,11.43 43.88,10.81 35.95,10.81 35.33,11.43 U14.15 29.26,11.43 28.64,10.81 20.71,10.81 20.09,11.43 U13.15 ; v1(66.37,52.07) U8.15 59.74,52.07 59.12,51.45 51.19,51.45 50.57,52.07 U7.15 44.5,52.07 43.88,51.45 35.95,51.45 35.33,52.07 U6.15 29.26,52.07 28.64,51.45 20.71,51.45 20.09,52.07 U5.15 v1(13.89,52.07) ; U1.15 20.09,72.39 20.71,71.77 28.64,71.77 29.26,72.39 U2.15 35.33,72.39 v1(35.94,71.78) 35.95,71.77 46.91,71.77 47.52,72.39 U3.15 50.57,72.39 51.19,71.77 v1(59.12,71.77) 59.74,72.39 U4.15 ; v1(7.16,31.13) 13.2,31.13 13.82,31.75 U9.15 20.09,31.75 20.71,31.13 28.64,31.13 29.26,31.75 U10.15 35.33,31.75 35.95,31.13 43.88,31.13 44.5,31.75 U11.15 50.57,31.75 51.19,31.13 v1(59.61,31.13) 60.22,31.75 U12.15
  BOTTOM w0.178: v1(35.94,71.78) 35.31,72.42 34.7,72.42 34.03,73.08 J1.23 ; v1(66.37,52.07) 64.03,52.07 61.9,54.2 61.9,65.02 61.37,65.56 61.37,70.69 60.28,71.77 v1(59.12,71.77) ; v1(13.89,52.07) 12.98,51.16 12.98,50.34 12.07,49.43 v1(12.07,46.91) 12.07,44.7 11.84,44.48 11.84,32.64 10.33,31.13 v1(7.16,31.13) ; v1(66.85,11.43) 64.52,11.43 62.51,13.44 62.51,23.98 61.42,25.07 61.42,30.47 60.76,31.13 v1(59.61,31.13)
A6: length 300.2
  TOP w0.178: v1(13.82,53.34) U5.16 20.78,53.34 21.43,52.69 28.12,52.69 28.78,53.34 U6.16 36.02,53.34 36.67,52.69 43.36,52.69 44.02,53.34 U7.16 51.26,53.34 51.91,52.69 58.6,52.69 59.26,53.34 U8.16 v1(66.37,53.34) ; TP18.1 3.51,43.18 4.27,42.42 4.27,41.78 6.45,39.6 9.68,39.6 10.67,38.61 v1(10.67,38.53) ; U1.16 20.78,73.66 21.43,73.01 28.12,73.01 28.78,73.66 U2.16 v1(35.69,73.66) 36.02,73.66 36.67,73.01 46.34,73.01 46.99,73.66 U3.16 51.26,73.66 51.91,73.01 58.6,73.01 v1(59.26,73.66) U4.16 ; v1(66.85,12.7) U16.16 59.26,12.7 58.6,12.05 51.91,12.05 51.26,12.7 U15.16 44.02,12.7 43.36,12.05 36.67,12.05 36.02,12.7 U14.16 28.78,12.7 28.12,12.05 21.43,12.05 20.78,12.7 U13.16 ; U12.16 v1(59.74,33.02) 59.26,33.02 58.6,32.37 51.91,32.37 51.26,33.02 U11.16 44.02,33.02 43.36,32.37 36.67,32.37 36.02,33.02 U10.16 28.78,33.02 28.12,32.37 21.43,32.37 20.78,33.02 U9.16 13.23,33.02 12.62,32.4 v1(7.16,32.4)
  BOTTOM w0.178: v1(66.85,12.7) 65.23,12.7 63.53,14.4 63.53,30.51 61.01,33.02 v1(59.74,33.02) ; J1.25 34.83,73.98 35.15,73.66 v1(35.69,73.66) ; v1(59.26,73.66) 60.53,73.66 63.04,71.15 63.04,55.04 64.74,53.34 v1(66.37,53.34) ; v1(13.82,53.34) 13.18,52.7 11.99,52.7 11.07,51.79 11.07,45.29 10.67,44.88 v1(10.67,38.53) 10.67,33.91 9.16,32.4 v1(7.16,32.4)
A7: length 295.3
  TOP w0.178: TP20.1 3.56,40.64 5.26,38.94 9.07,38.94 v1(9.47,38.53) ; U4.17 v1(59.23,74.93) 58.8,74.93 58.17,74.29 52.55,74.29 51.92,74.93 U3.17 46.61,74.93 45.97,74.29 37.31,74.29 36.68,74.93 v1(35.81,74.93) U2.17 28.32,74.93 27.69,74.29 22.07,74.29 21.44,74.93 U1.17 ; U13.17 21.44,13.97 22.07,13.33 27.69,13.33 28.32,13.97 U14.17 36.68,13.97 37.31,13.33 42.93,13.33 43.56,13.97 U15.17 51.92,13.97 52.55,13.33 58.17,13.33 58.8,13.97 U16.17 v1(66.8,13.97) ; v1(7.16,33.67) 12.47,33.67 13.08,34.29 U9.17 21.44,34.29 22.07,33.65 27.69,33.65 28.32,34.29 U10.17 36.68,34.29 37.31,33.65 42.93,33.65 43.56,34.29 U11.17 51.92,34.29 52.55,33.65 58.17,33.65 58.8,34.29 v1(59.72,34.29) U12.17 ; v1(66.32,54.61) U8.17 58.8,54.61 58.17,53.97 52.55,53.97 51.92,54.61 U7.17 43.56,54.61 42.93,53.97 37.31,53.97 36.68,54.61 U6.17 28.32,54.61 27.69,53.97 22.07,53.97 21.44,54.61 U5.17 v1(13.74,54.61)
  BOTTOM w0.178: v1(66.8,13.97) 65.63,13.97 64.69,14.91 64.69,31.06 61.47,34.29 v1(59.72,34.29) ; v1(59.23,74.93) 60.99,74.93 64.21,71.7 64.21,55.55 65.15,54.61 v1(66.32,54.61) ; J1.27 35.63,75.11 v1(35.81,74.93) ; v1(7.16,33.67) 8.12,33.67 9.47,35.03 v1(9.47,38.53) 9.47,45.08 10.01,45.62 10.01,52.83 11.13,53.95 13.08,53.95 v1(13.74,54.61)
A8: length 294.1
  TOP w0.178: U12.18 v1(59.79,35.56) 58.39,35.56 57.76,34.92 53.16,34.92 52.53,35.56 U11.18 43.15,35.56 42.52,34.92 37.92,34.92 37.29,35.56 U10.18 27.91,35.56 27.28,34.92 22.68,34.92 22.05,35.56 U9.18 12.83,35.56 12.17,34.91 v1(7.22,34.91) 7.04,35.09 7.04,37.39 6.32,38.1 TP23.1 ; v1(66.34,55.88) U8.18 58.39,55.88 57.76,55.24 53.16,55.24 52.53,55.88 U7.18 43.15,55.88 42.52,55.24 37.92,55.24 37.29,55.88 U6.18 27.91,55.88 27.28,55.24 22.68,55.24 22.05,55.88 U5.18 v1(13.56,55.88) ; v1(66.83,15.24) U16.18 58.39,15.24 57.76,14.6 53.16,14.6 52.53,15.24 U15.18 43.15,15.24 42.52,14.6 37.92,14.6 37.29,15.24 U14.18 27.91,15.24 27.28,14.6 22.68,14.6 22.05,15.24 U13.18 ; U4.18 v1(59.31,76.2) 58.39,76.2 57.76,75.56 53.16,75.56 52.53,76.2 U3.18 43.15,76.2 42.52,75.56 37.92,75.56 37.29,76.2 36.44,76.2 v1(36.43,76.21) 36.42,76.2 U2.18 27.91,76.2 27.28,75.56 22.68,75.56 22.05,76.2 U1.18
  BOTTOM w0.178: v1(59.79,35.56) 62.13,35.56 66.47,31.22 66.47,25.04 65.81,24.38 65.81,15.62 66.19,15.24 v1(66.83,15.24) ; v1(66.34,55.88) 65.71,55.88 65.33,56.26 65.33,72.52 61.65,76.2 v1(59.31,76.2) ; v1(13.56,55.88) 12.93,55.24 10.65,55.24 8.99,53.58 8.99,46.08 8.36,45.44 8.36,35.57 7.69,34.91 v1(7.22,34.91) ; J1.29 v1(36.43,76.21)
A9: length 277.9
  TOP w0.178: U12.5 v1(52.48,40.64) 52.07,40.64 51.38,39.95 43.99,39.95 43.31,40.64 U11.5 36.83,40.64 36.14,39.95 28.75,39.95 28.07,40.64 U10.5 21.59,40.64 20.9,39.95 13.51,39.95 12.83,40.64 U9.5 7.29,40.64 v1(6.88,41.05) ; TP25.1 2.62,35.48 v1(6.3,35.48) ; v1(57.91,20.32) U16.5 52.07,20.32 51.38,19.63 43.99,19.63 43.31,20.32 U15.5 36.83,20.32 36.14,19.63 28.75,19.63 28.07,20.32 U14.5 21.59,20.32 20.9,19.63 13.51,19.63 12.83,20.32 U13.5 ; U4.5 v1(52.88,81.28) 52.07,81.28 51.38,80.59 43.64,80.59 42.95,81.28 U3.5 37.81,78.89 v1(37.23,78.89) 36.23,79.88 28.17,79.88 26.77,81.28 U2.5 21.59,81.28 20.9,80.59 13.51,80.59 12.83,81.28 U1.5 ; v1(57.48,60.96) U8.5 52.07,60.96 51.38,60.27 43.99,60.27 43.31,60.96 U7.5 36.83,60.96 36.14,60.27 28.75,60.27 28.07,60.96 U6.5 21.59,60.96 20.9,60.27 13.51,60.27 12.83,60.96 U5.5 v1(7.59,60.96)
  BOTTOM w0.178: J1.31 v1(37.23,78.89) ; v1(6.3,35.48) 6.3,39.55 6.88,40.13 v1(6.88,41.05) 6.88,45.26 6.32,45.83 6.32,49.28 6.81,49.77 6.86,49.77 6.86,60.22 v1(7.59,60.96) ; v1(57.48,60.96) 53.75,64.69 53.75,69.72 52.88,70.59 v1(52.88,81.28) ; v1(57.91,20.32) 54.08,24.16 54.08,28.98 52.48,30.58 v1(52.48,40.64)
A10: length 100.7
  TOP w0.178: TP2.1 11.43,3.58 16.84,8.99 29.08,8.99 29.36,9.27 36.35,9.27 36.73,8.89 v1(36.78,8.89)
  BOTTOM w0.178: v1(36.78,8.89) 35.84,9.83 35.84,20.9 32.05,24.69 32.05,26.37 31.27,27.15 31.27,41.3 32.13,42.16 32.13,70.36 30.63,71.86 30.63,74.12 29.23,75.52 J1.11
CAS_B_0: length 166.1
  TOP w0.178: v1(36.63,18.9) 36.42,18.69 7.8,18.69 3.63,22.86 TP35.1 ; U2.23 29.42,82.55 28.81,83.17 21.11,83.17 20.5,82.55 U1.23 18.19,82.58 v1(16.38,82.58) ; v1(17.86,78.89) 19.15,78.89 20.12,77.93 32.51,77.93 32.89,78.3 v1(41.23,78.3) ; v1(35.59,41.91) U10.23 29.39,41.91 28.77,42.53 21.11,42.53 20.5,41.91 U9.23 v1(16.48,41.91)
  BOTTOM w0.178: J1.41 v1(41.23,78.3) ; v1(16.38,82.58) 17.86,81.1 v1(17.86,78.89) 17.86,43.28 v1(16.48,41.91) ; v1(35.59,41.91) 32.79,39.12 32.79,24.97 36.63,21.13 v1(36.63,18.9)
CAS_B_1: length 179.9
  TOP w0.178: U3.23 50.98,82.55 51.59,83.17 59.25,83.17 59.87,82.55 U4.23 v1(65.86,82.55) 65.86,80.95 64.82,79.91 57.89,79.91 55.6,77.62 43.01,77.62 v1(42.03,78.61) ; v1(48.08,18.19) 47.83,17.93 7.42,17.93 6.15,19.2 4.65,19.2 3.53,20.32 TP37.1 ; v1(66.37,41.91) U12.23 59.87,41.91 59.25,42.53 51.59,42.53 50.98,41.91 U11.23 48.67,41.94 v1(46.89,41.94)
  BOTTOM w0.178: v1(65.86,82.55) 65.86,74.19 67.13,72.92 67.13,57.58 67.82,56.9 67.82,43.36 v1(66.37,41.91) ; v1(46.89,41.94) 46.61,41.66 46.61,26.97 48.08,25.5 v1(48.08,18.19) ; J1.43 v1(42.03,78.61)
CAS_B_2: length 127.6
  TOP w0.178: U13.23 v1(20.5,21.59) 21.11,22.21 28.77,22.21 29.39,21.59 v1(31.06,21.59) U14.23 ; v1(31.32,17.32) 7.06,17.32 6.6,17.78 TP39.1 ; v1(38.25,62.86) 36.35,62.86 35.71,62.23 U6.23 29.39,62.23 28.77,62.85 21.11,62.85 v1(20.5,62.23) U5.23
  BOTTOM w0.178: J1.45 42.83,69.35 38.25,64.77 v1(38.25,62.86) ; v1(31.06,21.59) 31.29,21.36 31.29,17.35 v1(31.32,17.32) ; v1(20.5,21.59) 19.68,22.41 19.68,25.61 20.09,26.03 20.09,45.09 19.68,45.51 19.68,50.33 20.73,51.38 20.73,62 v1(20.5,62.23)
CAS_B_3: length 154.2
  TOP w0.178: v1(49.35,17.91) 48.13,16.69 7.04,16.69 5.59,15.24 TP41.1 ; v1(42.11,62.92) 43.92,62.92 44.6,62.23 U7.23 50.98,62.23 51.59,62.85 59.25,62.85 59.87,62.23 U8.23 v1(66.55,62.23) ; U15.23 v1(50.65,21.59) 50.98,21.59 51.59,22.21 59.25,22.21 59.87,21.59 U16.23 v1(67.39,21.59)
  BOTTOM w0.178: v1(66.55,62.23) 66.55,56.62 67.01,56.16 67.01,50.88 65.25,49.12 65.25,34.92 67.61,32.56 67.61,21.82 v1(67.39,21.59) ; v1(42.11,62.92) 41.48,63.55 41.48,67.26 43.63,69.41 J1.47 ; v1(50.65,21.59) 49.35,20.29 v1(49.35,17.91)
DQ0: length 129.6
  TOP w0.178: U9.1 v1(14.02,45.72) ; U13.1 v1(12.22,25.4) ; U1.1 v1(12.22,86.36) 12.9,87.05 20.35,87.05 v1(20.59,87.29) ; U5.1 v1(12.22,66.04) ; v1(19.05,6.43) TP1.1
  BOTTOM w0.178: v1(20.59,87.29) 31.53,87.29 32.11,86.72 32.11,84.35 30.03,82.28 J1.14 ; v1(12.22,86.36) 13.26,85.32 13.26,67.08 v1(12.22,66.04) 15.67,62.59 15.67,49.12 14.02,47.47 v1(14.02,45.72) 14.02,27.2 v1(12.22,25.4) 12.22,25.17 19.05,18.34 v1(19.05,6.43)
DQ1: length 132.5
  TOP w0.178: U13.2 v1(12.22,24.13) ; v1(31.78,88.14) 22.86,88.14 20.43,85.71 12.83,85.71 v1(12.22,85.09) U1.2 ; U9.2 v1(13.06,44.45) ; v1(21.59,4.93) TP4.1 ; U5.2 v1(12.22,64.77)
  BOTTOM w0.178: v1(12.22,85.09) 12.53,84.78 12.53,67.83 11.51,66.8 11.51,65.48 v1(12.22,64.77) 14.78,62.2 14.78,49.76 13.26,48.23 13.26,44.65 v1(13.06,44.45) 13.26,44.25 13.26,27.91 11.51,26.16 11.51,24.84 v1(12.22,24.13) 17.45,18.9 17.45,5.61 18.14,4.93 v1(21.59,4.93) ; v1(31.78,88.14) 31.83,88.14 32.69,87.27 32.69,84.05 30.83,82.19 J1.16
DQ2: length 121.3
  TOP w0.178: U13.24 v1(15.72,22.86) ; U9.24 v1(15.72,43.18) ; v1(24.13,4.93) TP7.1 ; v1(33.43,87.4) 32.94,87.4 32.66,87.12 23.52,87.12 20.9,84.51 20.5,84.51 19.81,83.82 U1.24 v1(15.72,83.82) ; U5.24 v1(15.72,63.5)
  BOTTOM w0.178: v1(15.72,83.82) 14.53,82.63 14.53,64.69 v1(15.72,63.5) 16.31,62.92 16.31,46.79 15.72,46.2 v1(15.72,43.18) 14.66,42.11 14.66,23.93 v1(15.72,22.86) 24.13,14.45 v1(24.13,4.93) ; v1(33.43,87.4) 33.07,87.05 33.07,83.41 31.63,81.97 J1.18
DQ3: length 123.8
  TOP w0.178: v1(34.24,87.78) 34.06,87.96 32.41,87.96 32.08,87.63 23.22,87.63 20.68,85.09 U1.25 v1(15.72,85.09) ; v1(26.67,4.93) TP9.1 ; U9.25 16.36,44.45 v1(16.33,44.42) ; U13.25 v1(15.72,24.13) ; U5.25 v1(15.72,64.77)
  BOTTOM w0.178: v1(26.67,4.93) 26.67,7.75 25.55,8.86 25.55,14.3 v1(15.72,24.13) 15.37,24.49 15.37,41.66 16.33,42.62 v1(16.33,44.42) 16.99,45.08 16.99,63.5 v1(15.72,64.77) 15.37,65.13 15.37,82.3 16.33,83.26 16.33,84.48 v1(15.72,85.09) ; v1(34.24,87.78) 34.24,87.5 33.73,86.99 33.73,83.13 32.43,81.83 J1.20
DQ4: length 122.3
  TOP w0.178: v1(29.21,4.93) TP12.1 ; U2.1 v1(27.46,86.36) 29.39,86.36 30,85.74 v1(35.84,85.74) ; U10.1 v1(27.46,45.72) ; U6.1 v1(27.46,66.04) ; U14.1 v1(27.46,25.4)
  BOTTOM w0.178: v1(35.84,85.74) 35.45,85.74 34.26,84.56 34.26,82.83 33.23,81.79 J1.22 ; v1(29.21,4.93) 29.29,4.93 29.97,5.61 29.97,22.89 v1(27.46,25.4) 28.5,26.44 28.5,44.68 v1(27.46,45.72) 28.5,46.76 28.5,65 v1(27.46,66.04) 24.49,66.04 24.18,66.34 24.18,71.4 21.94,73.64 21.94,83.38 22.69,84.14 28.05,84.14 28.5,84.58 28.5,85.32 v1(27.46,86.36)
DQ5: length 118.5
  TOP w0.178: v1(29.24,6.6) 29.24,6.07 31.75,3.56 TP14.1 ; U6.2 v1(27.46,64.77) ; U14.2 v1(27.46,24.13) ; v1(35.31,84.43) 35.3,84.44 30.8,84.44 30.15,85.09 v1(27.46,85.09) U2.2 ; U10.2 v1(27.46,44.45)
  BOTTOM w0.178: v1(35.31,84.43) 34.9,84.02 34.9,82.63 34.03,81.76 J1.24 ; v1(29.24,6.6) 29.24,22.5 27.61,24.13 v1(27.46,24.13) 26.75,24.84 26.75,26.16 27.77,27.19 27.77,44.14 v1(27.46,44.45) 26.75,45.16 26.75,46.48 27.77,47.51 27.77,64.46 v1(27.46,64.77) 24.69,64.77 23.47,65.99 23.47,69.65 21.18,71.93 21.18,84.25 22.02,85.09 v1(27.46,85.09)
DQ6: length 111.7
  TOP w0.178: v1(29.77,84.38) 30.33,83.82 U2.24 35.64,83.82 v1(35.89,84.07) ; U10.24 v1(30.96,43.18) ; U6.24 v1(30.96,63.5) ; v1(34.29,4.93) TP17.1 ; U14.24 v1(30.96,22.86)
  BOTTOM w0.178: v1(29.77,84.38) 28.83,83.44 25.43,83.44 23.93,81.94 23.93,72.59 24.92,71.6 24.92,67.26 25.34,66.84 27.62,66.84 v1(30.96,63.5) 29.77,62.31 29.77,44.37 v1(30.96,43.18) 29.77,41.99 29.77,24.05 v1(30.96,22.86) 34.29,19.53 v1(34.29,4.93) ; J1.26 34.83,81.9 35.38,82.45 35.38,83.57 v1(35.89,84.07)
DQ7: length 112.9
  TOP w0.178: U6.25 v1(30.96,64.77) ; U14.25 v1(30.96,24.13) ; v1(36.83,4.93) TP19.1 ; U10.25 v1(30.96,44.45) ; v1(30.96,85.09) U2.25 35.94,85.09 v1(35.97,85.06)
  BOTTOM w0.178: v1(30.96,85.09) 30.96,84.84 28.91,82.78 25.55,82.78 24.51,81.74 24.51,73.13 25.68,71.96 25.68,67.92 26.21,67.39 28.35,67.39 v1(30.96,64.77) 31.57,64.16 31.57,62.94 30.61,61.98 30.61,44.81 v1(30.96,44.45) 31.57,43.84 31.57,42.62 30.61,41.66 30.61,24.49 v1(30.96,24.13) 35.31,19.79 35.31,5.79 36.17,4.93 v1(36.83,4.93) ; v1(35.97,85.06) 36.42,84.61 36.42,82.88 35.63,82.09 J1.28
DQ8: length 117.3
  TOP w0.178: v1(42.52,6.73) 39.37,3.58 TP22.1 ; U15.1 v1(42.7,25.4) ; v1(43.74,65) 42.7,66.04 U7.1 ; v1(45.31,86.23) 45.19,86.36 U3.1 v1(37.06,86.36) ; U11.1 v1(42.7,45.72)
  BOTTOM w0.178: J1.30 36.43,81.79 36.83,82.19 36.83,86.13 v1(37.06,86.36) ; v1(42.52,6.73) 42.52,8.28 43.64,9.4 43.64,24.46 v1(42.7,25.4) 43.74,26.44 43.74,44.68 v1(42.7,45.72) 43.74,46.76 v1(43.74,65) 45.57,66.83 47.27,66.83 48.35,67.91 48.35,71.69 49.43,72.77 49.43,79.35 49.66,79.58 49.66,82.4 48.93,83.12 46.11,83.12 45.31,83.92 v1(45.31,86.23)
DQ9: length 110.5
  TOP w0.178: U7.2 v1(42.7,64.77) ; v1(44.68,84.96) 44.55,85.09 U3.2 37.74,85.09 v1(37.64,84.99) ; U11.2 v1(42.7,44.45) ; U15.2 v1(42.7,24.13) ; v1(41.91,4.93) TP24.1
  BOTTOM w0.178: v1(37.64,84.99) 37.23,84.58 J1.32 ; v1(41.91,4.93) 41.91,8.76 42.93,9.78 42.93,23.9 v1(42.7,24.13) 41.99,24.84 41.99,26.16 43.01,27.19 43.01,44.14 v1(42.7,44.45) 41.99,45.16 41.99,46.48 43.01,47.51 43.01,64.46 v1(42.7,64.77) 45.36,67.44 46.91,67.44 47.88,68.4 47.88,72.69 48.97,73.79 48.97,81.84 48.39,82.42 45.95,82.42 44.68,83.69 v1(44.68,84.96)
DQ10: length 117.1
  TOP w0.178: v1(38.35,85.72) 45.57,85.72 v1(46.2,85.09) U3.25 ; U11.25 v1(46.2,44.45) ; v1(44.45,4.93) TP26.1 ; U7.25 v1(50.7,64.77) ; U15.25 v1(46.2,24.13)
  BOTTOM w0.178: v1(38.35,85.72) 38.35,84.99 37.74,84.37 37.74,82.99 38.03,82.7 J1.34 ; v1(44.45,4.93) 47.07,7.54 47.07,23.27 v1(46.2,24.13) 45.85,24.49 45.85,41.66 46.81,42.62 46.81,43.84 v1(46.2,44.45) 45.85,44.81 45.85,61.98 48.64,64.77 v1(50.7,64.77) 49.99,65.48 49.99,69.49 52.15,71.65 52.15,83.08 50.8,84.43 46.86,84.43 v1(46.2,85.09)
DQ11: length 112.5
  TOP w0.178: v1(38.18,83.92) 38.18,84.02 38.59,84.44 41.95,84.44 42.47,83.92 46.1,83.92 v1(46.2,83.82) U3.24 ; U11.24 v1(46.2,43.18) ; TP28.1 46.99,7.11 v1(46.2,7.9) ; U7.24 v1(46.2,63.5) ; U15.24 v1(46.2,22.86)
  BOTTOM w0.178: v1(46.2,7.9) v1(46.2,22.86) 45.01,24.05 45.01,41.99 v1(46.2,43.18) 45.01,44.37 45.01,62.31 v1(46.2,63.5) 49.05,66.34 49.05,69.39 49.94,70.28 49.94,79.08 51.66,80.81 51.66,82.4 50.24,83.82 v1(46.2,83.82) ; v1(38.18,83.92) 38.83,83.27 J1.36
DQ12: length 127.4
  TOP w0.178: U16.1 58.12,25.4 v1(58.17,25.35) ; v1(42.34,87.17) 42.82,87.66 52.45,87.66 53.75,86.36 U4.1 v1(57.94,86.36) ; U12.1 v1(57.94,45.72) ; v1(49.53,4.93) TP30.1 ; U8.1 v1(57.94,66.04)
  BOTTOM w0.178: J1.38 39.63,84.46 v1(42.34,87.17) ; v1(57.94,86.36) 58.94,85.36 58.94,85.1 55.85,82.02 55.85,68.12 v1(57.94,66.04) 57.94,65 58.67,64.26 58.67,46.46 v1(57.94,45.72) 58.7,44.96 58.7,44.04 56.9,42.24 56.9,28.88 58.17,27.61 v1(58.17,25.35) 58.17,23.7 59.26,22.61 59.26,10.82 52.83,4.39 50.24,4.39 49.71,4.93 v1(49.53,4.93)
DQ13: length 120.3
  TOP w0.178: v1(43.12,86.8) 43.48,87.17 51.92,87.17 54,85.09 U4.2 v1(57.94,85.09) ; v1(57.43,24.54) 57.02,24.13 U16.2 ; v1(57.43,64.82) 57.38,64.77 U8.2 ; v1(52.07,4.93) TP32.1 ; U12.2 v1(57.94,44.45)
  BOTTOM w0.178: v1(43.12,86.8) 40.43,84.12 J1.40 ; v1(57.94,85.09) 57.51,85.09 54.89,82.47 54.89,67.36 v1(57.43,64.82) 58.04,64.21 58.04,47.29 57.23,46.48 57.23,45.16 v1(57.94,44.45) 56.21,42.72 56.21,28.75 57.43,27.53 v1(57.43,24.54) 57.43,23.57 58.7,22.3 58.7,12.22 56.59,10.11 56.59,9.4 52.12,4.93 v1(52.07,4.93)
DQ14: length 131.4
  TOP w0.178: U16.24 v1(59.89,22.86) ; U4.24 v1(61.44,83.82) 61.44,84 58.09,87.35 54.1,87.35 53.3,88.15 v1(43.98,88.15) ; U8.24 v1(59.26,63.5) ; U12.24 v1(60.02,43.18) ; v1(54.61,5.05) TP34.1
  BOTTOM w0.178: J1.42 41.23,83.72 43.98,86.47 v1(43.98,88.15) ; v1(54.61,5.05) 59.89,10.34 v1(59.89,22.86) 58.9,23.85 58.9,27.74 58.01,28.63 58.01,41.17 v1(60.02,43.18) 60.02,45.26 59.26,46.02 v1(59.26,63.5) 59.26,64.62 58.65,65.23 58.65,66.19 56.87,67.97 56.87,79.25 v1(61.44,83.82)
DQ15: length 129.9
  TOP w0.178: v1(54.33,88.11) 54.56,87.88 58.65,87.88 v1(61.44,85.09) U4.25 ; U16.25 v1(59.56,24.13) ; v1(59.41,66.29) 60.93,64.77 U8.25 ; v1(57.15,4.93) TP36.1 ; U12.25 v1(61.44,44.45)
  BOTTOM w0.178: v1(61.44,85.09) 62.05,84.48 62.05,83.06 57.93,78.93 57.93,67.78 v1(59.41,66.29) 59.41,65.25 60.01,64.65 60.01,45.88 v1(61.44,44.45) 61.44,43.33 58.5,40.39 58.5,29.11 59.46,28.14 59.46,24.23 v1(59.56,24.13) 60.66,23.04 60.66,8.43 v1(57.15,4.93) ; J1.44 42.03,83.15 44.65,85.78 44.65,86.89 45.87,88.11 v1(54.33,88.11)
RAS_B_0: length 127.5
  TOP w0.178: v1(57.58,80.9) 56.57,79.88 42.49,79.88 41.94,79.32 39.09,79.32 38.61,78.84 v1(38.58,78.84) ; v1(7.01,81.94) 7.62,82.55 U1.4 13.39,82.55 14,81.93 20.69,81.93 21.31,82.55 U2.4 28.63,82.55 29.24,81.93 35.93,81.93 36.55,82.55 U3.4 43.59,82.55 44.25,81.89 45.03,81.89 45.08,81.93 50.06,81.93 50.06,81.94 51.18,81.94 51.79,82.55 U4.4 55.52,82.47 v1(57.58,82.47) ; TP27.1 3.53,33.02 4.39,33.88 v1(4.39,34.14)
  BOTTOM w0.178: J1.33 38.03,78.29 v1(38.58,78.84) ; v1(4.39,34.14) 4.39,78.92 7.01,81.53 v1(7.01,81.94) ; v1(57.58,80.9) v1(57.58,82.47)
RAS_B_1: length 100.5
  TOP w0.178: U8.4 51.79,62.23 51.17,61.61 v1(50.67,61.61) 44.48,61.61 43.87,62.23 U7.4 v1(36.55,62.23) 35.93,61.61 29.24,61.61 28.63,62.23 U6.4 21.31,62.23 20.69,61.61 14,61.61 13.39,62.23 U5.4 5.66,62.23 v1(5.13,61.7) ; TP29.1 3.58,30.48 v1(4.72,31.62)
  BOTTOM w0.178: v1(36.55,62.23) 36.55,65.2 38.83,67.48 J1.35 ; v1(4.72,31.62) 5.13,32.03 v1(5.13,61.7)
RAS_B_2: length 103.4
  TOP w0.178: v1(4.8,28.7) 4.37,28.7 3.61,27.94 TP31.1 ; v1(5.71,41.5) 6.12,41.91 U9.4 13.39,41.91 14,41.29 20.69,41.29 21.31,41.91 U10.4 28.63,41.91 29.24,41.29 35.93,41.29 v1(36.55,41.91) U11.4 43.87,41.91 44.48,41.29 51.17,41.29 v1(51.79,41.91) U12.4
  BOTTOM w0.178: v1(4.8,28.7) 5.71,29.62 v1(5.71,41.5) ; J1.37 39.63,67.52 37.11,65 37.11,50.62 36.86,50.37 36.86,42.21 v1(36.55,41.91)
RAS_B_3: length 113.3
  TOP w0.178: TP33.1 3.56,25.4 7.37,21.59 U13.4 13.39,21.59 14,20.97 20.69,20.97 21.31,21.59 U14.4 28.63,21.59 29.24,20.97 35.93,20.97 36.55,21.59 v1(37.72,21.59) U15.4 43.87,21.59 44.48,20.97 51.17,20.97 51.79,21.59 U16.4
  BOTTOM w0.178: v1(37.72,21.59) 38.84,22.71 38.84,50.95 38.48,51.32 38.47,51.32 37.69,52.1 37.69,64.8 40.43,67.53 J1.39
WE_B: length 282
  TOP w0.178: v1(7.49,63.07) 7.92,63.5 U5.3 13.67,63.5 14.32,62.85 20.17,62.85 20.83,63.5 U6.3 28.91,63.5 29.56,62.85 35.41,62.85 36.07,63.5 U7.3 44.15,63.5 44.8,62.85 50.65,62.85 51.31,63.5 U8.3 v1(57.29,63.5) ; v1(6.27,43.18) U9.3 13.67,43.18 14.32,42.53 20.17,42.53 20.83,43.18 U10.3 28.91,43.18 29.56,42.53 35.41,42.53 36.07,43.18 U11.3 44.15,43.18 44.8,42.53 50.65,42.53 51.31,43.18 v1(53.16,43.18) U12.3 ; TP38.1 3.53,12.7 v1(4.8,13.97) ; v1(7.47,22.83) 9.69,22.83 U13.3 13.67,22.86 14.32,22.21 20.17,22.21 20.83,22.86 U14.3 28.91,22.86 29.56,22.21 35.41,22.21 36.07,22.86 U15.3 44.15,22.86 44.8,22.21 50.65,22.21 51.31,22.86 U16.3 v1(57.35,22.86) ; U4.3 v1(53.54,83.82) 51.31,83.82 50.65,83.17 45.26,83.17 45.09,83.34 v1(44.07,83.34) 42.29,83.34 41.81,83.82 U3.3 39.19,83.82 38.54,83.17 29.56,83.17 28.91,83.82 U2.3 20.83,83.82 20.17,83.17 14.32,83.17 13.67,83.82 U1.3
  BOTTOM w0.178: v1(53.54,83.82) 53.54,72.72 54.38,71.88 54.38,66.41 v1(57.29,63.5) ; v1(6.27,43.18) 5.71,43.74 5.71,61.29 v1(7.49,63.07) ; v1(4.8,13.97) 4.8,20.17 v1(7.47,22.83) ; v1(57.35,22.86) 55.27,24.94 55.27,29.87 53.16,31.98 v1(53.16,43.18) ; v1(44.07,83.34) 42.83,82.1 J1.46

## Copper pours and planes (outline as drawn; the poured copper is in the pictures)
GND on BOTTOM (solid shape): 48.67,81.64 48.67,74.14 47.29,72.77 47.29,68.63 46.76,68.1 44.7,68.1 44.2,68.61 44.2,73.94 45.8,75.54 45.8,81.84 48.46,81.84
GND on TOP: 0.51,87.63 1.48,89.96 3.81,90.93 69.85,90.93 72.18,89.96 73.15,87.63 73.15,3.81 72.18,1.48 69.85,0.51 58.83,0.51 58.83,3.58 64.64,3.58 70.79,9.73 70.79,11.15 70.82,11.18 70.82,80.39 62.26,88.95 11.38,88.95 3.23,80.8 3.23,60.63 0.51,60.63
GND on BOTTOM: 0.51,87.63 1.48,89.96 3.81,90.93 69.85,90.93 72.18,89.96 73.15,87.63 73.15,3.81 72.18,1.48 69.85,0.51 3.81,0.51 1.48,1.48 0.51,3.81 ; 1 cut-out
GND on GND: 0.51,87.63 1.48,89.96 3.81,90.93 69.85,90.93 72.18,89.96 73.15,87.63 73.15,3.81 72.18,1.48 69.85,0.51 3.81,0.51 1.48,1.48 0.51,3.81
VCC_5V0 on BOTTOM (solid shape): 27.89,81.84 27.89,79.5 28.19,79.2 29.34,79.2 29.57,78.97 29.57,78.46 29.44,78.33 28.32,78.33 27.89,77.9 27.89,75.46 29.97,73.38 29.97,68.68 29.49,68.2 26.97,68.2 26.59,68.58 26.59,70 27.46,70.87 27.46,71.88 24.97,74.37 24.97,81.71 25.37,82.12 27.61,82.12
VCC_5V0 on POWER: 0.51,87.63 1.48,89.96 3.81,90.93 69.85,90.93 72.18,89.96 73.15,87.63 73.15,3.81 72.18,1.48 69.85,0.51 3.81,0.51 1.48,1.48 0.51,3.81

## Text on the board
Ref Des/Silkscreen Top: RAS0 | RAS1 | RAS2 | RAS3 | CAS0 | CAS1 | CAS2 | CAS3 | WE | OE | A0 | A1 | A2 | A3 | A4 | A5 | A6 | A7 | A8 | A9 | A10 | D0 | D1 | D2 | D3 | D4 | D5 | D6 | D7 | D8 | D9 | D10 | D11 | D12 | D13 | D14 | D15 | DRAM_8M | BANK0 | BANK1 | BANK2 | BANK3
NCLEGEND-1-4: FIGURE | FINISHED_SIZE | 7.87 | 11.81 | 125.98 | 39.37 | 51.18 | DRILL CHART: TOP to BOTTOM | ALL UNITS ARE IN MILS | PLATED | NON-PLATED | QTY | 649 | 171 | 4 | 1
